# Altium PCB ver_4.PcbDoc
Units mil, origin at the board's own origin, x right, y up, seen from the top; angles counter-clockwise.
Board outline 2834.65 x 4685.04 mil, 2 copper layers (Top Layer, Bottom Layer); 59 components, 48 nets, 245 pads, 35 vias.
Unrouted connection lines stored in the file: 4.
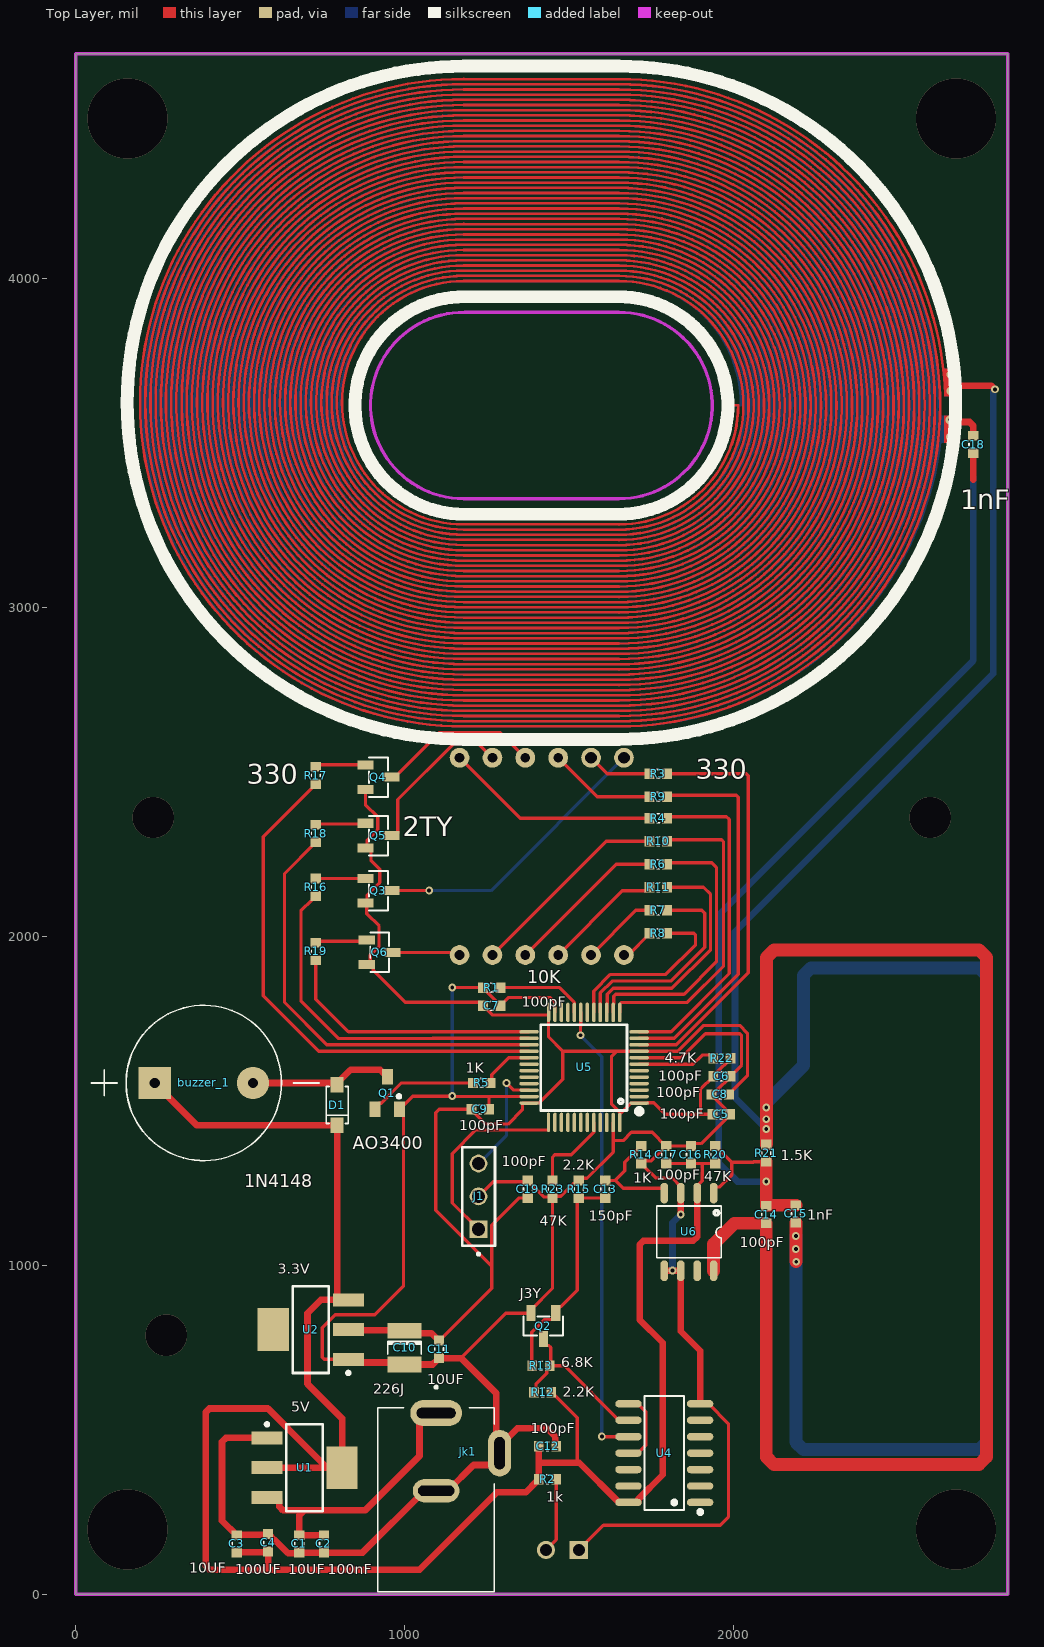
[diagram p0: Top Layer view]
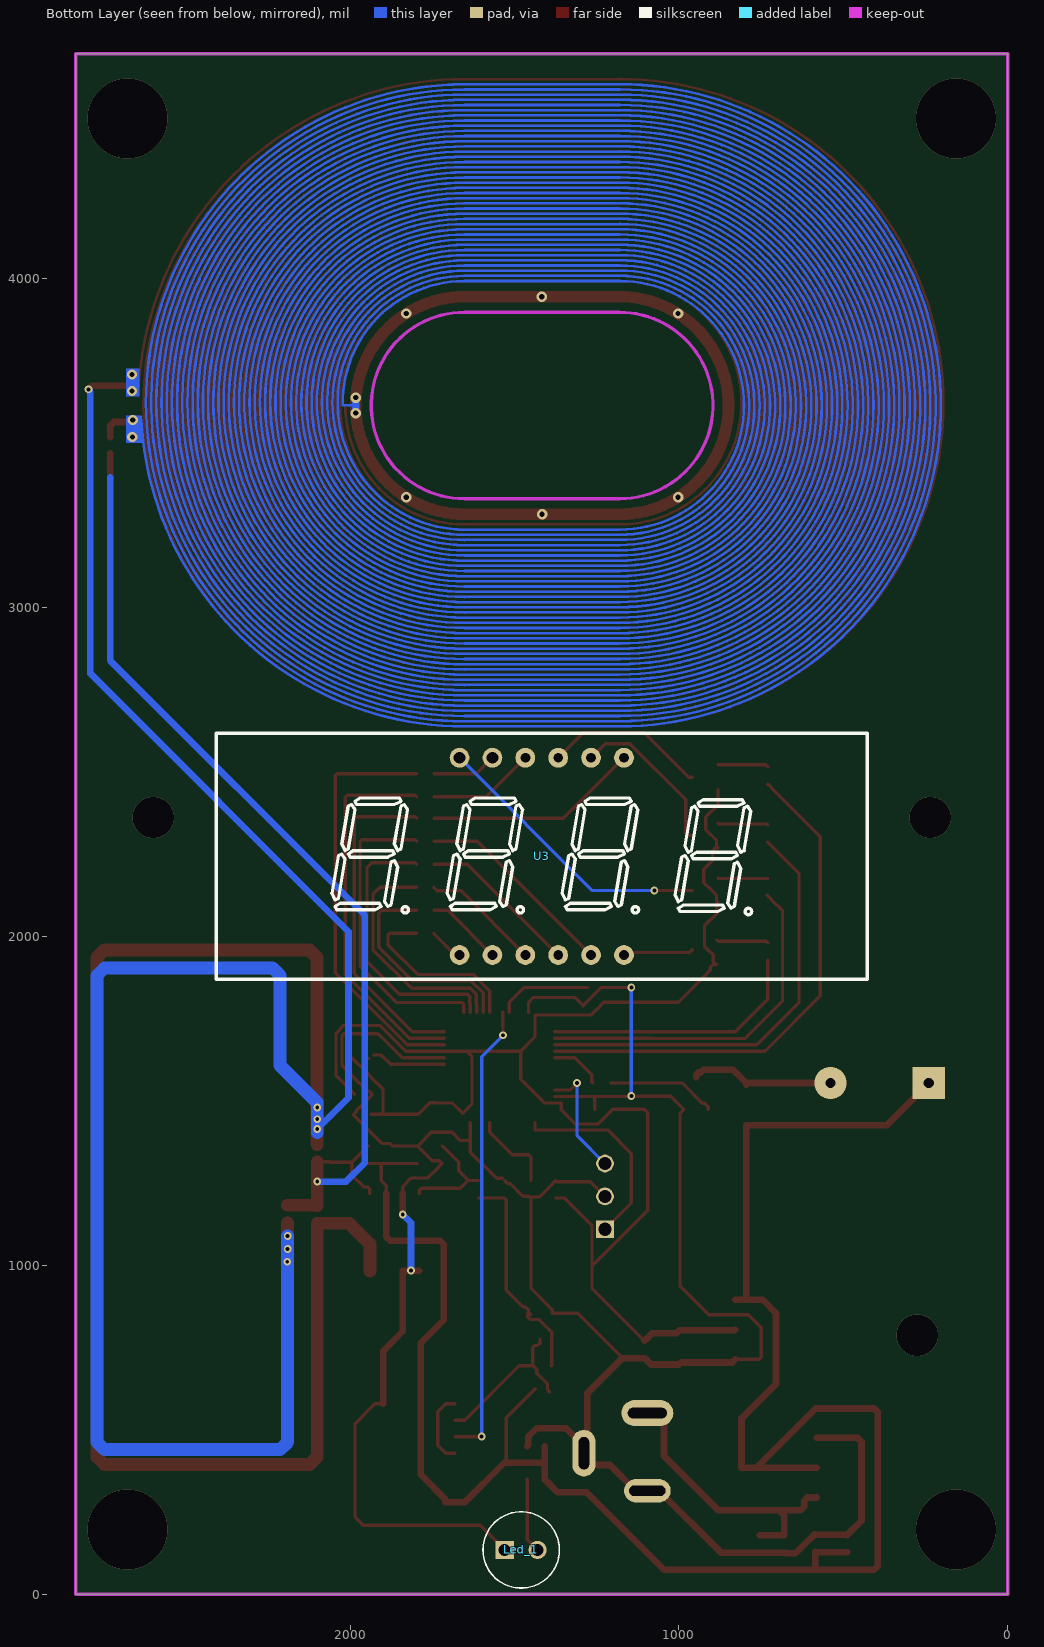
[diagram p1: Bottom Layer view, seen from below]
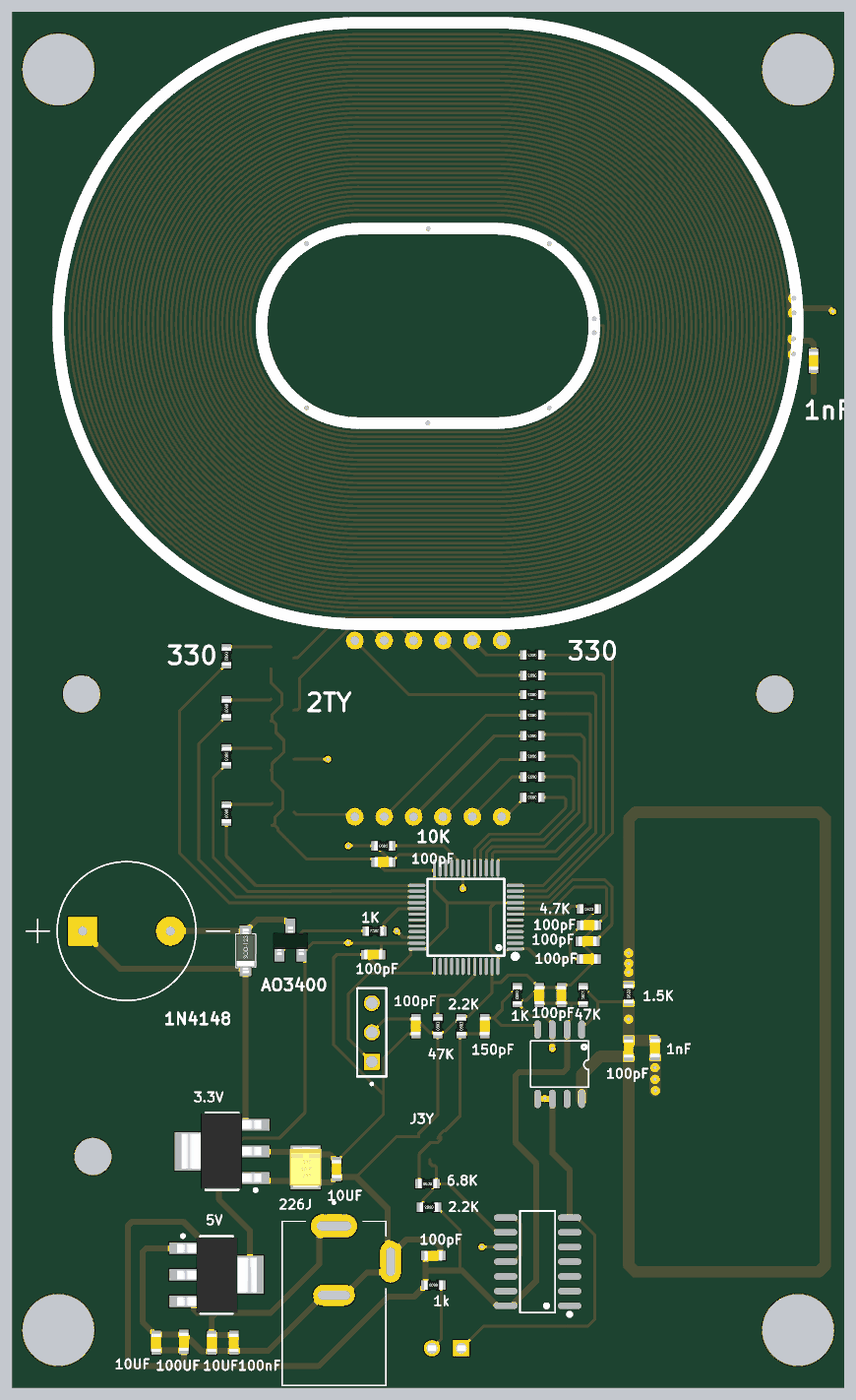
[diagram p2: 3D render of the assembled board from above, using the file's embedded part models]

## Layer stack, top to bottom
Top Solder: solder mask 0.4, Solder Resist, Dk 3.5
Top Layer: signal copper 1.4
Dielectric 1: dielectric 12.6, FR-4, Dk 4.8
Bottom Layer: signal copper 1.4
Bottom Solder: solder mask 0.4, Solder Resist, Dk 3.5

## Board outline
0,0 2834.65,0 2834.65,4685 0,4685.04

## Design rules (kind name [scope] priority, off if disabled: settings)
Clearance [All] p1: gap=7.87 ignorepadtopadclearanceinfootprint=FALSE
PolygonConnect [All] p1: connectstyle=Relief reliefconductorwidth=10 reliefentries=4 polygonreliefangle="90 Angle" airgapwidth=10
RoutingVias [All] p1: holewidth=28 width=50 viastyle="Through Hole" minholewidth=11.81 minwidth=23.62 maxholewidth=11.81 maxwidth=23.62
SolderMaskExpansion [All] p1: expansion=4 istentingtop=FALSE
Width [All] p1: maxlimit=39.37 minlimit=10 preferedwidth=20
30 further rules are at their usual default settings.

## Classes and differential pairs
component class ver_3: buzzer_1 C1 C2 C3 C4 C5 C6 C7 C8 C9 C10 C11 C12 C13 C16 C17 C19 D1 J1 jk1 Led_1 Q1 Q2 Q3 Q4 Q5 Q6 R1 R2 R3 R4 R5 R6 R7 R8 R9 R10 R11 R12 R13 R14 R15 R16 R17 R18 R19 R20 R22 R23 U1 U2 U3 U4 U5 U6

## Components (designator, comment, footprint, x,y, rotation, side; value= is the part's Value field where it differs from the comment)
buzzer_1 "buzzer_12mm" buzzer_12mm 389.61,1555 r0 top
C1 "10uF" CN-SMD-0603 680,153.43 r90 top
C2 "100nF" CN-SMD-0603 755,153.43 r90 top
C3 "10uF" CN-SMD-0603 490,153.43 r270 top
C4 "100uF" CN-SMD-0603 585,156.57 r270 top
C5 "104" CN-SMD-0603 1963.43,1460 r0 top
C6 "104" CN-SMD-0603 1965,1575 r0 top
C7 "104" CN-SMD-0603 1265,1790 r180 top
C8 "104" CN-SMD-0603 1960,1520 r180 top
C9 "104" CN-SMD-0603 1230,1475 r180 top
C10 "226J" C_Tanta_3528 1000,750 r270 top
C11 "10uF" CN-SMD-0603 1105,745 r90 top
C12 "104" CN-SMD-0603 1435,450 r180 top
C13 "150pF" CN-SMD-0603 1610,1231.57 r90 top
C14 "100pF" CN-SMD-0603 2100,1155 r90 top
C15 "1nF" CN-SMD-0603 2190,1156.57 r90 top
C16 "104" CN-SMD-0603 1871.04,1336.57 r270 top
C17 "104" CN-SMD-0603 1796.04,1336.57 r270 top
C18 "1nF" CN-SMD-0603 2730,3496.57 r270 top
C19 "104" CN-SMD-0603 1375,1231.57 r90 top
D1 "1N4148" SOD-123 793.43,1485.63 r270 top value=1N4007
J1 "JP3x1" JP3x1 1225,1035 r90 top
jk1 "jack dc" "jack dc" 1096.18,551.22 r270 top
Led_1 "led_5mm" led_5mm 1480,135 r180 bottom
Q1 "AO3400" SOT23B 947.76,1524.39 r0 top value=C1815
Q2 "J3Y" j3y -15174.6,-16136.99 r90 top
Q3 "2TY" 2TY 17873.25,-14457 r180 top
Q4 "2TY" 2TY 17873.25,-14112 r180 top
Q5 "2TY" 2TY 17873.25,-14289.6 r180 top
Q6 "2TY" 2TY 17876.99,-14644.6 r180 top
R1 "10K" RES-SMD-0603 1265,1845 r0 top value="R1/4W - 1K"
R2 "1K" RES-SMD-0603 1435,350 r180 top value="R1/4W - 1K"
R3 "330" RES-SMD-0603 1771.57,2495 r180 top value="R1/4W - 1K"
R4 "330" RES-SMD-0603 1771.57,2360 r180 top value="R1/4W - 1K"
R5 "1K" RES-SMD-0603 1235,1555 r180 top value="R1/4W - 1K"
R6 "330" RES-SMD-0603 1771.57,2220 r180 top value="R1/4W - 1K"
R7 "330" RES-SMD-0603 1771.57,2080 r180 top value="R1/4W - 1K"
R8 "330" RES-SMD-0603 1771.57,2010 r180 top value="R1/4W - 1K"
R9 "330" RES-SMD-0603 1771.57,2425 r180 top value="R1/4W - 1K"
R10 "330" RES-SMD-0603 1771.57,2290 r180 top value="R1/4W - 1K"
R11 "330" RES-SMD-0603 1771.57,2150 r180 top value="R1/4W - 1K"
R12 "2.2K" RES-SMD-0603 1420,615 r180 top value="R1/4W - 1K"
R13 "6.8K" RES-SMD-0603 1415,695 r0 top value="R1/4W - 1K"
R14 "1K" RES-SMD-0603 1720,1336.57 r270 top value="R1/4W - 1K"
R15 "2.2K" RES-SMD-0603 1530,1231.57 r90 top value="R1/4W - 1K"
R16 "330" RES-SMD-0603 730,2150 r270 top value="R1/4W - 1K"
R17 "330" RES-SMD-0603 730,2490 r270 top value="R1/4W - 1K"
R18 "330" RES-SMD-0603 730,2313.43 r270 top value="R1/4W - 1K"
R19 "330" RES-SMD-0603 730,1955 r270 top value="R1/4W - 1K"
R20 "47K" RES-SMD-0603 1945,1336.57 r90 top value="R1/4W - 1K"
R21 "1K5" RES-SMD-0603 2100,1341.57 r90 top value="R1/4W - 1K"
R22 "4.7K" RES-SMD-0603 1965,1630 r0 top value="R1/4W - 1K"
R23 "47K" RES-SMD-0603 1450,1231.57 r90 top value="R1/4W - 1K"
U1 "AMS1117" AMS1117-SOT223 695.83,385 r0 top
U2 "AMS1117" AMS1117-SOT223 715,805 r180 top
U3 "7seg4_5461AS-1_1" 7seg4_5461AS-1 1417.32,2244.09 r180 bottom
U4 "SN74HC14DRG4" 74HC14 1790,425 r90 top
U5 "STM32F103C8T6" LQFP-48_L7.0-W7.0-P0.50-LS9.0-BL 1546.1,1602.32 r90 top
U6 "MC12079" MC12079 1865,1101.89 r180 top

## Footprints (in the part's own frame and the unit in brackets; to place one, negate y for a bottom-side part, rotate by r counter-clockwise, add the part's x,y. Pads: shape width x height; smd on the part's side, far side on the other; paste and mask are expansions set on the pad)
2TY [mm]
  rect 1.25x0.7 smd paste+0 mask+0.051: 1(431.596,-422.514) 2(431.596,-420.614) 3(429.597,-421.564)
  silkscreen extent 429.87,-423.09 431.32,-420.04
7seg4_5461AS-1 [mil]
  round 60 hole 30 paste+0 mask+2: 1(-250,-300) 2(-150,-300) 3(-50,-300) 4(50,-300) 5(150,-300) 6(250,-300) 7(250,300) 8(150,300) 9(50,300) 10(-50,300)
  round 60 hole 36 paste+0 mask+2: 11(-150,300) 12(-250,300)
  silkscreen extent -990,-374 990,374
74HC14 [mil]
  oval 22.6x80.24 smd paste+0 mask+2: 1(-145.63,-109.02) 2(-95.63,-109.02) 3(-45.63,-109.02) 4(4.37,-109.02) 5(54.37,-109.02) 6(104.37,-109.02) 7(154.37,-109.02) 8(154.37,109.02) 9(104.37,109.02) 10(54.37,109.02) 11(4.37,109.02) 12(-45.63,109.02) 13(-95.63,109.02) 14(-145.63,109.02)
  silkscreen extent -181,-115 178,60
AMS1117-SOT223 [mm]
  rect 2.4x1 smd: 1(-2.9,2.3) 2(-2.9,0) 3(-2.9,-2.3)
  rect 2.4x3.3 smd: 2(2.9,0)
  silkscreen extent -3.02,-3.35 1.4,3.47, body extent -3.39,-3.27 3.5,3.23, height 1.72
buzzer_12mm [mm]
  round 2.5 hole 0.8: N(3.8,0)
  rect 2.5x2.5 / inner round 2.5 / far side rect 2.5x2.5 hole 0.8: P(-3.8,0)
  silkscreen extent -8.69,-6 8.92,6
C_Tanta_3528 [mm]
  rect 1.2x2.6 smd: 1(-1.3,0) 2(1.3,0)
  silkscreen extent -0.56,-1.3 0.51,1.3, body extent -1.75,-1.4 1.71,1.4, height 1.94
CN-SMD-0603 [mm]
  round 0.254 on Mech15: 0(0,0)
  rect 0.75x0.8 smd: 1(-0.675,0) 2(0.675,0)
  silkscreen extent -0.1,-0.34 0.1,0.34, body extent -0.8,-0.43 0.8,0.43, height 0.8
j3y [mm]
  rect 1.25x0.7 smd paste+0 mask+0.051: 1(431.596,-422.514) 2(431.596,-420.614) 3(429.597,-421.564)
  silkscreen extent 429.87,-423.09 431.32,-420.04
"jack dc" [mm]
  oval 2x4 hole 0.8 slot 3 at 90 deg: 1(0,0)
  oval 1.8x3.6 hole 0.8 slot 2.8 at 90 deg: 2(6,0)
  oval 3.6x1.8 hole 0.8 slot 2.5 at 0 deg: 3(3.1,4.9)
  silkscreen extent -2.1,-4.5 13.8,4.5
JP3x1 [mm]
  rect 1.37x1.37 hole 1.02: 01(1.905,0)
  round 1.37 hole 1.02: 02(4.445,0) 03(6.985,0)
  silkscreen extent -0.11,-1.27 8.25,1.27
led_5mm [mm]
  round 1.4 hole 0.93: A(1.27,0)
  rect 1.4x1.4 / inner round 1.4 / far side rect 1.4x1.4 hole 0.93: C(-1.27,0)
  silkscreen extent -2.95,-2.95 2.95,2.95, body extent -2.5,-2.95 2.95,2.95, height 9.6
LQFP-48_L7.0-W7.0-P0.50-LS9.0-BL [mm]
  oval 0.27x1.5 smd paste+0 mask+0.05: 1(-2.75,-4.25) 2(-2.25,-4.25) 3(-1.75,-4.25) 4(-1.25,-4.25) 5(-0.75,-4.25) 6(-0.25,-4.25) 7(0.25,-4.25) 8(0.75,-4.25) 9(1.25,-4.25) 10(1.75,-4.25) 11(2.25,-4.25) 12(2.75,-4.25) 25(2.75,4.25) 26(2.25,4.25) 27(1.75,4.25) 28(1.25,4.25) 29(0.75,4.25) 30(0.25,4.25) 31(-0.25,4.25) 32(-0.75,4.25) 33(-1.25,4.25) 34(-1.75,4.25) 35(-2.25,4.25) 36(-2.75,4.25)
  oval 1.5x0.27 smd paste+0 mask+0.05: 13(4.25,-2.75) 14(4.25,-2.25) 15(4.25,-1.75) 16(4.25,-1.25) 17(4.25,-0.75) 18(4.25,-0.25) 19(4.25,0.25) 20(4.25,0.75) 21(4.25,1.25) 22(4.25,1.75) 23(4.25,2.25) 24(4.25,2.75) 37(-4.25,2.75) 38(-4.25,2.25) 39(-4.25,1.75) 40(-4.25,1.25) 41(-4.25,0.75) 42(-4.25,0.25) 43(-4.25,-0.25) 44(-4.25,-0.75) 45(-4.25,-1.25) 46(-4.25,-1.75) 47(-4.25,-2.25) 48(-4.25,-2.75)
  silkscreen extent -3.59,-4.46 3.3,3.34, body extent -4.5,-4.5 4.5,4.5, height 1.5
MC12079 [mm]
  oval 0.6x1.6 smd paste+0 mask+0.051: 1(-1.905,-3) 2(-0.635,-3) 3(0.635,-3) 4(1.905,-3) 5(1.905,3) 6(0.635,3) 7(-0.635,3) 8(-1.905,3)
  silkscreen extent -2.5,-2 2.5,2
RES-SMD-0603 [mm]
  round 0.254 on Mech15: 0(0,0)
  rect 0.75x0.8 smd: 1(-0.675,0) 2(0.675,0)
  silkscreen extent -0.1,-0.34 0.1,0.34, body extent -0.8,-0.4 0.8,0.4, height 0.43
SOD-123 [mm]
  rect 1.2x1 smd: 1(-1.635,0.04) 2(1.515,0.04)
  silkscreen extent -1.48,-0.81 1.37,0.89, body extent -1.98,-0.81 1.87,0.89, height 1.43
SOT23B [mm]
  rect 0.85x1.2 smd: 1(0.946,-1.255) 2(0.006,1.24) 3(-0.944,-1.26)
  silkscreen extent 0.77,-0.39 1.02,-0.14, body extent -1.49,-1.31 1.51,1.19, height 1.06

## Part data
C1 C2 C3 C4 C11: library part "CAP 104"
C5 C6 C7 C8 C9 C12 C13 C14 C15 C16 C17 C18 C19: library part "Tu 0805_1", "Tu 0805", Bottom=10, Right=20
C10: library part "CAP POL"
D1: library part D1A, "Diode 1A"
Q1: library part C1815, "NPN 600mW, ECB"
Q2: library part S8050/J3Y/0.4
R1 R12 R13 R14 R15 R20 R21 R22 R23: library part "Tro 0805_1", "Tro 0805"
R2 R3 R4 R5 R6 R7 R8 R9 R10 R11 R16 R17 R18 R19: library part Res, "Resistor 1/4W"
U5: library part APM32F030C8T6

## Via types
v1: diameter 23.62, hole 11.81, Top Layer to Bottom Layer, 16 vias
v2: diameter 31.5, hole 15.75, Top Layer to Bottom Layer, 12 vias
v3: diameter 244.09, hole 244.09, Top Layer to Bottom Layer, 4 vias
v4: diameter 125.98, hole 125.98, Top Layer to Bottom Layer, 3 vias

## Nets (pads, with @x,y where several pads share a name; then routed paths per layer and width w, separated by ;. In a path a pad name is that pad's centre, name@x,y a point inside that pad or via, vN(x,y) a via of type N, cw(c..) or ccw(c..) an arc to the next point about the centre after c; other vN are vias at no path point)
3V3: C5.1 C6.1 C7.2 C8.1 C9.2 C10.1 C11.2 C19.1 Q3.2 Q4.2 Q5.2 Q6.2 R22.2 U2.2 U5.1 U5.9 U5.24 U5.36 U5.48 | length 4870.4
  Top Layer w10: Q4.2 881.26,2401.4 918.74,2363.92 918.74,2325.69 885.97,2292.92 885.97,2274.71 Q5.2 889.14,2270 897.92,2261.22 897.92,2232.08 925,2205 925,2164.55 902.59,2142.13 902.13,2142.13 885.97,2125.97 885.97,2107.31 Q3.2 885,2098.86 885,2070 922.48,2032.52 922.48,1970.69 909.02,1957.24 896.02,1944.23 896.02,1923.78 Q6.2@887.24,1915 ; Q6.2 Q6.2@887.24,1915 ; C11.2 1105.98,771.57 1264.84,930.43 1264.84,998.01 ; C19.1 1347.13,1205 1264.84,1122.71 1264.84,998.01 ; 1654.25,1465.36 1629.61,1490 1629.61,1636.14 1645,1651.53 ; U5.48@1657.39,1462.23 1689.21,1494.05 U5.1 1737.8,1494.05 1738.76,1495 1758.43,1495 1793.43,1460 1900,1460 ; C5.1 1900,1460 ; C8.1 1986.57,1520.98 2042.87,1577.28 2042.87,1706.55 2019.42,1730 1910,1730 1831.52,1651.53 U5.9 1645,1651.53 ; R22.2 1991.57,1629.02 1948.31,1585.75 1948.19,1585.75 1938.43,1575.98 C6.1 1938.43,1574.02 1900,1535.59 1900,1460 ; Q6.2@887.24,1915 895.83,1915 904.61,1906.22 904.61,1897.63 1001.49,1800.75 1228.66,1800.75 1238.43,1790.98 C7.2 1238.43,1789.02 1248.19,1779.25 1250.75,1779.25 1268.62,1761.38 1437.55,1761.38 1437.84,1761.09 1437.84,1695 1481.31,1651.53 ; 1264.84,998.01 1221.51,1041.35 1095,1167.86 1095,1464.14 1105.86,1475 C9.2 1203.43,1474.02 1247.44,1430 1314.74,1430 1358.47,1473.73 1358.47,1493.76 1358.76,1494.05 U5.36 1378.91,1494.17 1409.15,1494.17 1481.31,1566.33 1481.31,1651.53 ; 1481.31,1651.53 1645,1651.53
  Top Layer w20: U2.2@829.17,805 831.08,803.09 998.09,803.09 C10.1 1006.77,794.41 1081.18,794.41 1099.25,776.34 1100.24,776.34 C11.2
4A: Q2.3 R12.2 R13.2 U4.9 | length 502.3
  Top Layer w10: R12.2 1399.89,621.47 1399.89,639.89 1432.42,672.42 1432.42,684.25 1443.17,695 R13.2@1445,695 ; Q2.3 1422.4,765.44 1431.18,756.66 1439.14,756.66 1445,750.8 R13.2@1445,695 ; U4.9 1652.16,529.37 1486.54,695 R13.2@1445,695
4Y: U4.8 U4.11 | length 227.7
  Top Layer w10: U4.11 1709.8,429.37 1733.98,453.55 1733.98,555.2 1709.8,579.37 U4.8
5V: buzzer_1.P C3.2 C4.2 C12.2 C16.2 C17.2 D1.2 R2.2 R12.1 R20.1 U1.2 U2.3 U4.14 U6.2 | length 6346.4
  Top Layer w10: R12.1@1436.74,624.83 1525,536.57 1525,400 ; C17.2 C16.2 1900,1310 R20.1 ; U6.2 1890,1242.35 1905,1257.35 1905,1310
  Top Layer w20: buzzer_1.P 369.02,1425.98 D1.2 795,905.24 U2.3@804.69,895.55 ; C3.2@488.43,128.43 C4.2@584.41,128.43 ; U1.2@581.65,385 U1.2@764.41,385 ; C4.2 585,80 580,75 ; U2.3 U2.3@804.69,895.55 ; C12.2 1408.43,400 ; U6.2 1890,1086.72 1878.28,1075 1726.72,1075 1715,1063.28 1715,835 1785,765 1785,363.31 1710.3,288.61 1710.3,280.57 1709.1,279.37 1652.16,279.37 1531.54,400 1408.43,400 ; 580,75 1045.74,75 1280.74,310 1368.43,310 1402.68,344.25 1403.66,344.25 1408.43,349.02 R2.2 1408.43,400 ; 580,75 406.72,75 395,86.72 395,553.28 406.72,565 584.41,565 708.38,441.03 U1.2@764.41,385 ; U1.2@764.41,385 810,385 810,535 705,640 705,855 745.55,895.55 795,895.55 U2.3@804.69,895.55
9V: C1.2 C2.2 jk1.1 U1.3 | length 881
  Top Layer w20: U1.3 609.21,294.45 618.9,284.76 618.9,266.72 630.61,255 695,255 ; C2.2 C1.2 680,240 695,255 ; jk1.1 1072.71,551.22 1045.57,524.09 1045.57,420.57 880,255 695,255
A: R3.2 U3.11 | length 198
  Top Layer w10: U3.11 1616.42,2495 R3.2
B: R4.2 U3.7 | length 653.9
  Top Layer w10: U3.7 1351.42,2360 R4.2
BOOT0: R23.2 U5.44 | length 259.2
  Top Layer w10: R23.2@1450.98,1258.15 R23.2 1450,1329.25 1457.25,1336.51 1507.39,1336.51 1575.51,1404.63 1575.51,1434.88 U5.44
buzzer: R5.1 U5.29 | length 161.7
  Top Layer w10: R5.1 1264.89,1558.32 1264.89,1579.89 1316.85,1631.85 U5.29
C: R6.2 U3.4 | length 492
  Top Layer w10: U3.4 1643.22,2220 R6.2
D: R7.2 U3.2 | length 234
  Top Layer w10: U3.2 1703.22,2080 R7.2
DIG1: Q3.3 U3.12 | length 874.7
  Top Layer w10: Q3.3 v1(1075,2140)
  Bottom Layer w10: v1(1075,2140) 1263.22,2140 U3.12
DIG2: Q4.3 U3.9 | length 494.7
  Top Layer w10: Q4.3 970.83,2485 1105.83,2620 1291.42,2620 U3.9
DIG3: Q5.3 U3.8 | length 499.9
  Top Layer w10: Q5.3 970.83,2307.4 979.61,2316.18 979.61,2417.02 1149.56,2586.97 1224.44,2586.97 U3.8
DIG4: Q6.3 U3.6 | length 213.9
  Top Layer w10: Q6.3@960,1960 967.95,1952.05 1159.37,1952.05 U3.6
DP: R11.2 U3.3 | length 363.5
  Top Layer w10: U3.3 1662.47,2139.25 1735.24,2139.25 1745,2149.02 R11.2
E: R8.2 U3.1 | length 105.6
  Top Layer w10: U3.1 1680.08,1944.1 1745,2009.02 R8.2
F: R9.2 U3.10 | length 327
  Top Layer w10: U3.10 1586.42,2425 R9.2
G: R10.2 U3.5 | length 621
  Top Layer w10: U3.5 1613.22,2290 R10.2
GND: C1.1 C2.1 C3.1 C4.1 C5.2 C6.2 C7.1 C8.2 C9.1 C10.2 C11.1 C12.1 C16.1 C17.1 C19.2 J1.02 jk1.2 jk1.3 Led_1.C Q1.1 Q2.2 R1.1 R14.2 R15.2 R23.1 U1.1 U2.1 U4.7 U5.8 U5.23 U5.35 U5.47 U6.3 U6.5 U6.6 | length 8666.1
  Top Layer w10: U2.1 828.62,715 755.86,715 750,720.86 750,810.96 789.04,850 910,850 996.73,936.73 996.73,1463.27 Q1.1 1025,1515 v1(1145,1515) ; v1(1145,1845) R1.1 ; v1@1146.26,1513.74 1256.57,1513.74 U5.35 ; 1171.57,718.43 1308.15,855 Q2.2 1385,865.83 1450,930.83 R23.1 ; J1.02 1270,1255 1371.85,1255 C19.2 1375.98,1258.15 1385.75,1248.39 1385.75,1247.4 1425.11,1208.04 1446.96,1208.04 R23.1 ; R1.1@1238.43,1844.02 1248.19,1834.25 1248.31,1834.25 C7.1@1291.57,1790.98 ; C9.1 1256.57,1510.93 ; jk1.3@1289.09,416.78 jk1.3 ; U5.23 1457.41,1769.76 1457.41,1800 1442.41,1815 1316.57,1815 1302.32,1800.75 1301.34,1800.75 C7.1@1291.57,1790.98 ; Led_1.C 1605,210 1960,210 1985,235 1985,519.14 1924.77,579.37 U4.7 ; R15.2 1520.24,1248.39 1512.35,1248.39 1474.89,1210.93 1455.93,1210.93 R23.1 ; R15.2@1536.74,1264.89 1554.89,1264.89 1634.8,1344.8 1634.8,1379.74 ; U5.47 1634.8,1434.87 1634.8,1379.74 ; U5.8 1841.85,1631.85 1915,1705 2019.14,1705 2025,1699.14 2025,1609.41 1991.57,1575.98 C6.2 1991.57,1574.02 1948.31,1530.75 1943.19,1530.75 1933.43,1520.98 C8.2 1933.43,1519.02 1980.24,1472.2 1980.24,1468.78 1990,1459.02 1901.79,1370.81 1878.7,1370.81 C16.1 C17.1 C17.1@1795.06,1363.15 ; U6.3 1840,1239.68 1813.59,1266.1 1763.9,1266.1 1730.75,1299.25 1730.75,1300.24 1720.98,1310 R14.2 1728.84,1318.84 1750.75,1318.84 C17.1@1795.06,1363.15 ; C7.1@1291.57,1790.98 C7.1 C7.1@1291.57,1790.98 ; 1634.8,1379.74 1664.74,1379.74 1690,1405 1753.21,1405 C17.1@1795.06,1363.15
  Top Layer w20: C3.1@488.68,180.17 445,223.86 445,463.84 456.72,475.55 U1.1 ; C3.1@490.59,181.57 583.43,181.57 C4.1 585.98,183.15 604.89,164.24 606.55,164.24 645.97,124.82 674.25,124.82 676.28,126.85 C1.1 C2.1 872.6,126.85 1060.75,315 jk1.2 1131.61,315 1209.9,393.28 1265.6,393.28 jk1.3@1289.09,416.78 ; U2.1 838.62,705 993.82,705 C10.2 1085.39,698.82 1099.25,712.68 1099.25,713.66 1104.02,718.43 C11.1 1171.57,718.43 1279.36,610.64 jk1.3@1279.36,450.84 ; jk1.3@1289.09,450.84 1343.25,505 1432.72,505 1458.18,479.54 1458.18,453.4 C12.1 ; U6.5 1815,983.78 U6.6 1840,800 1899.02,740.98 U4.7 ; v1(1840,1155) U6.3
  Bottom Layer w10: v1(1145,1515) v1(1145,1845)
  Bottom Layer w20: v1(1815,985) 1815,1130 v1(1840,1155)
Netbuzzer_1_N: buzzer_1.N D1.1 Q1.2 | length 442.8
  Top Layer w20: buzzer_1.N D1.1@795,1555 ; D1.1 795,1553.94 836.06,1595 926.21,1595 934.38,1586.84 941.27,1586.84 948,1580.1 Q1.2
NetC13_1: C13.1 Q2.1 R13.1 R15.1 | length 678.2
  Top Layer w10: R13.1 1388.43,695.98 1387.82,695.61 1387.6,695.83 1386.85,697.23 1386.85,797.3 1424.94,835.39 1451.02,835.39 1459.8,844.17 Q2.1 ; Q2.1@1450.26,850.26 1457.4,857.4 1457.4,863.43 1468.58,874.61 1474.61,874.61 1525,925 1525,1200 R15.1 C13.1
NetC14_1: C14.1 C15.1 C18.1 R21.2 U6.8 | length 7177.7
  Top Layer w39.37: U6.8 1940,1065 2003.43,1128.43 C14.1 2100,418.06 2123.06,395 2746.94,395 2770,418.06 2770,465 2770,1936.94 2746.94,1960 2124.21,1960 2101.15,1936.94 2101.15,1480 2101.15,1445 2101.15,1415 2101.15,1369.3 R21.2 ; v1@2190,1011.46 v1(2190,1050) v1(2190,1090) C15.1
  Bottom Layer w20: v1(2100,1415) 2005,1510 2005,2015 2790,2800 2790,3657.57 2795.73,3663.29 v1(2795.73,3664.27)
  other v1: 2191.26,1011.46 2100,1445 2100,1480
NetC14_2: C14.2 C15.2 C18.2 R20.2 R21.1 U6.1 | length 3178
  Top Layer w10: U6.1 1940,1232.51 1946.29,1238.8 1958.8,1238.8 1995,1275 1995,1314.13 ; R20.2 1945.98,1363.15 1995,1314.13 ; R21.1 2060.98,1315 2060.12,1314.13 1995,1314.13
  Top Layer w20: 2730,3390 C18.2
  Top Layer w39.37: R21.1 v1(2100,1255) C14.2 2101.57,1183.15 C15.2
  Bottom Layer w20: v1(2100,1255) 2012.6,1255 1955,1312.6 1955,2065 2730,2840 2730,3396.71
Netled_1_A: Led_1.A R2.1 | length 228.1
  Top Layer w10: Led_1.A 1461.57,166.57 R2.1
NetQ1_3: Q1.3 R5.2 | length 335.1
  Top Layer w10: Q1.3 910.6,1481.68 922.33,1493.41 929.22,1493.41 990.81,1555 R5.2
NetQ3_1: Q3.1 R16.1 | length 151.6
  Top Layer w10: R16.1 730.41,2176.99 880.85,2176.99 Q3.1
NetQ4_1: Q4.1 R17.1 | length 153.7
  Top Layer w10: R17.1 735.83,2522.4 Q4.1
NetQ5_1: Q5.1 R18.1 | length 153.3
  Top Layer w10: R18.1 732.4,2342.4 878.86,2342.4 Q5.1
NetQ6_1: Q6.1 R19.1 | length 158.4
  Top Layer w10: R19.1 734.11,1985.69 880.89,1985.69 Q6.1
NRST: R22.1 U5.7 | length 228.1
  Top Layer w10: U5.7 1877.15,1612.16 1905,1640 R22.1@1928.43,1640 ; R22.1@1943.63,1629.25 R22.1@1945.24,1629.25
OUT: C13.2 R14.1 U6.4 | length 339
  Top Layer w10: C13.2 1610.47,1258.62 1640.75,1258.62 ; R14.1 1719.02,1363.15 1670,1314.13 1670,1287.87 1640.75,1258.62 ; U6.4 1790,1228.39 1783.71,1234.68 1664.68,1234.68 1640.75,1258.62
PA0: R3.1 U5.10 | length 1270.5
  Top Layer w10: U5.10 1825.94,1671.22 2045,1890.28 2045,2489.14 2039.14,2495 R3.1
PA1: R9.1 U5.11 | length 1142.1
  Top Layer w10: U5.11 1820.34,1690.89 2015,1885.56 2015,2424.14 2009.14,2430 1803.15,2430 R9.1
PA2: R4.1 U5.12 | length 1011.7
  Top Layer w10: U5.12 1810.59,1710.59 1987.87,1887.87 1987.87,2356.27 1979.14,2365 1803.15,2365 R4.1
PA3: R10.1 U5.13 | length 943.4
  Top Layer w10: U5.13 1654.38,1793.83 1660.55,1800 1860,1800 1970,1910 1970,2289.14 1964.14,2295 1803.15,2295 R10.1
PA4: R6.1 U5.14 | length 851.3
  Top Layer w10: U5.14 1634.69,1794.02 1636.19,1795.52 1636.19,1819.14 1642.04,1825 1850,1825 1948.62,1923.62 1948.62,2210.52 1934.14,2225 1803.15,2225 R6.1
PA5: R11.1 U5.15 | length 735.7
  Top Layer w10: U5.15 1615.01,1794.02 1616.5,1795.51 1616.5,1824.73 1634.64,1842.87 1813.15,1842.87 1930.75,1960.47 1930.75,2128.39 1909.14,2150 R11.1
PA6: R7.1 U5.16 | length 656.1
  Top Layer w10: U5.16 1595.32,1828.83 1631.49,1865 1810,1865 1912.87,1967.87 1912.87,2071.27 1904.14,2080 R7.1
PA7: R8.1 U5.17 | length 550.8
  Top Layer w10: U5.17 1575.64,1834.42 1626.21,1885 1795,1885 1885,1975 1885,2004.14 1879.14,2010 R8.1
PB0: R17.2 U5.28 | length 1588.8
  Top Layer w10: R17.2 729.02,2463.43 719.25,2453.66 719.25,2452.68 570,2303.43 570,1820 738.48,1651.53 U5.28
PB1: U4.10 U5.19 | length 1398.3
  Top Layer w10: v1(1535,1700) 1535,1726.81 1536.15,1727.96 1536.15,1769.52 U5.19 ; v1(1600,480) 1600.63,479.37 U4.10
  Bottom Layer w10: v1(1535,1700) 1600,1635 v1(1600,480)
PB2: R1.2 U5.20 | length 288.5
  Top Layer w10: R1.2@1277.06,1845 1471.47,1845 1516.46,1800.02 1516.46,1769.76 U5.20
PC13: R19.2 U5.25 | length 808.4
  Top Layer w10: R19.2 730,1810 829.41,1710.59 U5.25
PC14: R16.2 U5.26 | length 1082.5
  Top Layer w10: R16.2@732.18,2125.61 731.2,2125.61 719.25,2113.66 719.25,2112.68 685,2078.43 685,1805 800,1690 1084.25,1690 1085.15,1690.89 U5.26
PC15: R18.2 U5.27 | length 1323.3
  Top Layer w10: R18.2 635,2191.85 635,1800 763.78,1671.22 U5.27
SWCLK: J1.01 U5.37 | length 608.5
  Top Layer w10: J1.01 1145,1190 1145,1340 1217.13,1412.13 1437.54,1412.13 1437.83,1412.42 U5.37
SWDIO: J1.03 U5.34 | length 357.9
  Top Layer w10: v1(1310,1555) 1331.46,1533.54 1378.67,1533.54 U5.34
  Bottom Layer w10: J1.03 1310,1395 v1(1310,1555)
pads on no net: C1.0 C2.0 C3.0 C4.0 C5.0 C6.0 C7.0 C8.0 C9.0 C11.0 C12.0 C13.0 C14.0 C15.0 C16.0 C17.0 C18.0 C19.0 R1.0 R2.0 R3.0 R4.0 R5.0 R6.0 R7.0 R8.0 R9.0 R10.0 R11.0 R12.0 R13.0 R14.0 R15.0 R16.0 R17.0 R18.0 R19.0 R20.0 R21.0 R22.0 R23.0 U4.1 U4.2 U4.3 U4.4 U4.5 U4.6 U4.12 U4.13 U5.2 U5.3 U5.4 U5.5 U5.6 U5.18 U5.21 U5.22 U5.30 U5.31 U5.32 U5.33 U5.38 U5.39 U5.40 U5.41 U5.42 U5.43 U5.45 U5.46 U6.7
copper on no net: | length 417770.4
  Top Layer w8: 1180.12,3993.8 ccw(c1180.12,3623.72) 1180.12,3253.64 1652.19,3253.64 ; 1180.12,4009.54 ccw(c1180.12,3623.72) 1180.12,3237.89 1652.19,3237.89 ; 1180.12,4025.29 ccw(c1180.12,3623.72) 1180.12,3222.14 1652.19,3222.14 ; 1180.12,4041.04 ccw(c1180.12,3623.72) 1180.12,3206.39 1652.19,3206.39 ; 1180.12,4056.79 ccw(c1180.12,3623.72) 1180.12,3190.65 1652.19,3190.65 ; 1180.12,4072.54 ccw(c1180.12,3623.72) 1180.12,3174.9 1652.19,3174.9 ; 1180.12,4088.28 ccw(c1180.12,3623.72) 1180.12,3159.15 1652.19,3159.15 ; 1180.12,4104.03 ccw(c1180.12,3623.72) 1180.12,3143.4 1652.19,3143.4 ; 1180.12,4119.78 ccw(c1180.12,3623.72) 1180.12,3127.65 1652.19,3127.65 ; 1180.12,4135.53 ccw(c1180.12,3623.72) 1180.12,3111.91 1652.19,3111.91 ; 1180.12,4151.28 ccw(c1180.12,3623.72) 1180.12,3096.16 1652.19,3096.16 ; 1180.12,4167.02 ccw(c1180.12,3623.72) 1180.12,3080.41 1652.19,3080.41 ; 1180.12,4182.77 ccw(c1180.12,3623.72) 1180.12,3064.66 1652.19,3064.66 ; 1180.12,4198.52 ccw(c1180.12,3623.72) 1180.12,3048.91 1652.19,3048.91 ; 1180.12,4214.27 ccw(c1180.12,3623.72) 1180.12,3033.17 1652.19,3033.17 ; 1180.12,4230.02 ccw(c1180.12,3623.72) 1180.12,3017.42 1652.19,3017.42 ; 1180.12,4245.76 ccw(c1180.12,3623.72) 1180.12,3001.67 1652.19,3001.67 ; 1180.12,4261.51 ccw(c1180.12,3623.72) 1180.12,2985.92 1652.19,2985.92 ; 1180.12,4277.26 ccw(c1180.12,3623.72) 1180.12,2970.17 1652.19,2970.17 ; 1180.12,4293.01 ccw(c1180.12,3623.72) 1180.12,2954.43 1652.19,2954.43 ; 1180.12,4308.76 ccw(c1180.12,3623.72) 1180.12,2938.68 1652.19,2938.68 ; 1180.12,4324.5 ccw(c1180.12,3623.72) 1180.12,2922.93 1652.19,2922.93 ; 1180.12,4340.25 ccw(c1180.12,3623.72) 1180.12,2907.18 1652.19,2907.18 ; 1180.12,4356 ccw(c1180.12,3623.72) 1180.12,2891.43 1652.19,2891.43 ; 1180.12,4371.75 ccw(c1180.12,3623.72) 1180.12,2875.69 1652.19,2875.69 ; 1180.12,4387.5 ccw(c1180.12,3623.72) 1180.12,2859.94 1652.19,2859.94 ; 1180.12,4403.24 ccw(c1180.12,3623.72) 1180.12,2844.19 1652.19,2844.19 ; 1180.12,4418.99 ccw(c1180.12,3623.72) 1180.12,2828.44 1652.19,2828.44 ; 1180.12,4434.74 ccw(c1180.12,3623.72) 1180.12,2812.69 1652.19,2812.69 ; 1180.12,4450.49 ccw(c1180.12,3623.72) 1180.12,2796.94 1652.19,2796.94 ; 1180.12,4466.24 ccw(c1180.12,3623.72) 1180.12,2781.2 1652.19,2781.2 ; 1180.12,4481.98 ccw(c1180.12,3623.72) 1180.12,2765.45 1652.19,2765.45 ; 1180.12,4497.73 ccw(c1180.12,3623.72) 1180.12,2749.7 1652.19,2749.7 ; 1180.12,4513.48 ccw(c1180.12,3623.72) 1180.12,2733.95 1652.19,2733.95 ; 1180.12,4529.23 ccw(c1180.12,3623.72) 1180.12,2718.2 1652.19,2718.2 ; 1180.12,4544.98 ccw(c1180.12,3623.72) 1180.12,2702.46 1652.19,2702.46 ; 1180.12,4560.72 ccw(c1180.12,3623.72) 1180.12,2686.71 1652.19,2686.71 ; 1180.12,4576.47 ccw(c1180.12,3623.72) 1180.12,2670.96 1652.19,2670.96 ; 1180.12,4592.22 ccw(c1180.12,3623.72) 1180.12,2655.21 1652.19,2655.21 ; 1180.12,4607.97 ccw(c1180.12,3623.72) 1180.12,2639.46 1652.19,2639.46 ; 1180.33,3993.58 1652.4,3993.58 cw(c1652.4,3615.63) 1652.4,3237.68 ; 1180.33,4009.33 1652.4,4009.33 cw(c1652.4,3615.63) 1652.4,3221.93 ; 1180.33,4025.08 1652.4,4025.08 cw(c1652.4,3615.63) 1652.4,3206.18 ; 1180.33,4040.83 1652.4,4040.83 cw(c1652.4,3615.63) 1652.4,3190.43 ; 1180.33,4056.57 1652.4,4056.57 ; 1180.33,4072.32 1652.4,4072.32 cw(c1652.4,3615.63) 1652.4,3158.94 ; 1180.33,4088.07 1652.4,4088.07 cw(c1652.4,3615.63) 1652.4,3143.19 ; 1180.33,4103.82 1652.4,4103.82 cw(c1652.4,3615.63) 1652.4,3127.44 ; 1180.33,4119.57 1652.4,4119.57 cw(c1652.4,3615.63) 1652.4,3111.69 ; 1180.33,4135.32 1652.4,4135.32 cw(c1652.4,3615.63) 1652.4,3095.94 ; 1180.33,4151.06 1652.4,4151.06 cw(c1652.4,3615.63) 1652.4,3080.2 ; 1180.33,4166.81 1652.4,4166.81 cw(c1652.4,3615.63) 1652.4,3064.45 ; 1180.33,4182.56 1652.4,4182.56 cw(c1652.4,3615.63) 1652.4,3048.7 ; 1180.33,4198.31 1652.4,4198.31 cw(c1652.4,3615.63) 1652.4,3032.95 ; 1180.33,4214.06 1652.4,4214.06 cw(c1652.4,3615.63) 1652.4,3017.2 ; 1180.33,4229.8 1652.4,4229.8 cw(c1652.4,3615.63) 1652.4,3001.46 ; 1180.33,4245.55 1652.4,4245.55 cw(c1652.4,3615.63) 1652.4,2985.71 ; 1180.33,4261.3 1652.4,4261.3 cw(c1652.4,3615.63) 1652.4,2969.96 ; 1180.33,4277.05 1652.4,4277.05 cw(c1652.4,3615.63) 1652.4,2954.21 ; 1180.33,4292.8 1652.4,4292.8 cw(c1652.4,3615.63) 1652.4,2938.46 ; 1180.33,4308.54 1652.4,4308.54 cw(c1652.4,3615.63) 1652.4,2922.72 ; 1180.33,4324.29 1652.4,4324.29 cw(c1652.4,3615.63) 1652.4,2906.97 ; 1180.33,4340.04 1652.4,4340.04 cw(c1652.4,3615.63) 1652.4,2891.22 ; 1180.33,4355.79 1652.4,4355.79 cw(c1652.4,3615.63) 1652.4,2875.47 ; 1180.33,4371.54 1652.4,4371.54 cw(c1652.4,3615.63) 1652.4,2859.72 ; 1180.33,4387.28 1652.4,4387.28 cw(c1652.4,3615.63) 1652.4,2843.98 ; 1180.33,4403.03 1652.4,4403.03 cw(c1652.4,3615.63) 1652.4,2828.23 ; 1180.33,4418.78 1652.4,4418.78 cw(c1652.4,3615.63) 1652.4,2812.48 ; 1180.33,4434.53 1652.4,4434.53 cw(c1652.4,3615.63) 1652.4,2796.73 ; 1180.33,4450.28 1652.4,4450.28 cw(c1652.4,3615.63) 1652.4,2780.98 ; 1180.33,4466.02 1652.4,4466.02 cw(c1652.4,3615.63) 1652.4,2765.24 ; 1180.33,4481.77 1652.4,4481.77 cw(c1652.4,3615.63) 1652.4,2749.49 ; 1180.33,4497.52 1652.4,4497.52 cw(c1652.4,3615.63) 1652.4,2733.74 ; 1180.33,4513.27 1652.4,4513.27 cw(c1652.4,3615.63) 1652.4,2717.99 ; 1180.33,4529.02 1652.4,4529.02 cw(c1652.4,3615.63) 1652.4,2702.24 ; 1180.33,4544.76 1652.4,4544.76 cw(c1652.4,3615.63) 1652.4,2686.5 ; 1180.33,4560.51 1652.4,4560.51 cw(c1652.4,3615.63) 1652.4,2670.75 ; 1180.33,4576.26 1652.4,4576.26 cw(c1652.4,3615.63) 1652.4,2655 ; 1180.33,4592.01 1652.4,4592.01 cw(c1652.4,3615.63) 1652.4,2639.25 ; 1180.33,4607.76 1652.4,4607.76 cw(c1652.4,3615.63) 2644.06,3646.2 ; 1652.4,3174.69 ccw(c1652.4,3615.63) 1652.4,4056.57 ; 1652.4,3253.43 ccw(c1652.4,3615.63) 2014.61,3615.63 1983.11,3615.63
  Top Layer w20: v2(2661.26,3571.24) 2667.5,3565 2718.28,3565 2730,3553.28 2730,3518.76 ; v2@2672.26,3659.24 2672.26,3675.61 2784.39,3675.61 2795.73,3664.27
  Top Layer w35.43: 1180.04,3284.53 cw(c1180.04,3615.24) 1182.4,3945.94 1652.48,3945.94 cw(c1652.48,3615.24) 1652.48,3284.53 1180.04,3284.53
  Bottom Layer w8: 1180.12,3993.8 ccw(c1180.12,3615.84) 1180.12,3237.89 1652.19,3237.89 ; 1180.12,4009.54 ccw(c1180.12,3615.84) 1180.12,3222.14 1652.19,3222.14 ; 1180.12,4025.29 ccw(c1180.12,3615.84) 1180.12,3206.39 1652.19,3206.39 ; 1180.12,4041.04 ccw(c1180.12,3615.84) 1180.12,3190.65 1652.19,3190.65 ; 1180.12,4056.79 ccw(c1180.12,3615.84) 1180.12,3174.9 1652.19,3174.9 ; 1180.12,4072.54 ccw(c1180.12,3615.84) 1180.12,3159.15 1652.19,3159.15 ; 1180.12,4088.28 ccw(c1180.12,3615.84) 1180.12,3143.4 1652.19,3143.4 ; 1180.12,4104.03 ccw(c1180.12,3615.84) 1180.12,3127.65 1652.19,3127.65 ; 1180.12,4119.78 ccw(c1180.12,3615.84) 1180.12,3111.91 1652.19,3111.91 ; 1180.12,4135.53 ccw(c1180.12,3615.84) 1180.12,3096.16 1652.19,3096.16 ; 1180.12,4151.28 ccw(c1180.12,3615.84) 1180.12,3080.41 1652.19,3080.41 ; 1180.12,4167.02 ccw(c1180.12,3615.84) 1180.12,3064.66 1652.19,3064.66 ; 1180.12,4182.77 ccw(c1180.12,3615.84) 1180.12,3048.91 1652.19,3048.91 ; 1180.12,4198.52 ccw(c1180.12,3615.84) 1180.12,3033.17 1652.19,3033.17 ; 1180.12,4214.27 ccw(c1180.12,3615.84) 1180.12,3017.42 1652.19,3017.42 ; 1180.12,4230.02 ccw(c1180.12,3615.84) 1180.12,3001.67 1652.19,3001.67 ; 1180.12,4245.76 ccw(c1180.12,3615.84) 1180.12,2985.92 1652.19,2985.92 ; 1180.12,4261.51 ccw(c1180.12,3615.84) 1180.12,2970.17 1652.19,2970.17 ; 1180.12,4277.26 ccw(c1180.12,3615.84) 1180.12,2954.43 1652.19,2954.43 ; 1180.12,4293.01 ccw(c1180.12,3615.84) 1180.12,2938.68 1652.19,2938.68 ; 1180.12,4308.76 ccw(c1180.12,3615.84) 1180.12,2922.93 1652.19,2922.93 ; 1180.12,4324.5 ccw(c1180.12,3615.84) 1180.12,2907.18 1652.19,2907.18 ; 1180.12,4340.25 ccw(c1180.12,3615.84) 1180.12,2891.43 1652.19,2891.43 ; 1180.12,4356 ccw(c1180.12,3615.84) 1180.12,2875.69 1652.19,2875.69 ; 1180.12,4371.75 ccw(c1180.12,3615.84) 1180.12,2859.94 1652.19,2859.94 ; 1180.12,4387.5 ccw(c1180.12,3615.84) 1180.12,2844.19 1652.19,2844.19 ; 1180.12,4403.24 ccw(c1180.12,3615.84) 1180.12,2828.44 1652.19,2828.44 ; 1180.12,4418.99 ccw(c1180.12,3615.84) 1180.12,2812.69 1652.19,2812.69 ; 1180.12,4434.74 ccw(c1180.12,3615.84) 1180.12,2796.94 1652.19,2796.94 ; 1180.12,4450.49 ccw(c1180.12,3615.84) 1180.12,2781.2 1652.19,2781.2 ; 1180.12,4466.24 ccw(c1180.12,3615.84) 1180.12,2765.45 1652.19,2765.45 ; 1180.12,4481.98 ccw(c1180.12,3615.84) 1180.12,2749.7 1652.19,2749.7 ; 1180.12,4497.73 ccw(c1180.12,3615.84) 1180.12,2733.95 1652.19,2733.95 ; 1180.12,4513.48 ccw(c1180.12,3615.84) 1180.12,2718.2 1652.19,2718.2 ; 1180.12,4529.23 ccw(c1180.12,3615.84) 1180.12,2702.46 1652.19,2702.46 ; 1180.12,4544.98 ccw(c1180.12,3615.84) 1180.12,2686.71 1652.19,2686.71 ; 1180.12,4560.72 ccw(c1180.12,3615.84) 1180.12,2670.96 1652.19,2670.96 ; 1180.12,4576.47 ccw(c1180.12,3615.84) 1180.12,2655.21 1652.19,2655.21 ; 1180.12,4592.22 ccw(c1180.12,3615.84) 1180.12,2639.46 1652.19,2639.46 ; 1180.33,3993.58 1652.4,3993.58 cw(c1652.4,3623.5) 2022.42,3617.05 ; 1180.33,4009.33 1652.4,4009.33 cw(c1652.4,3623.5) 1652.4,3237.68 ; 1180.33,4025.08 1652.4,4025.08 cw(c1652.4,3623.5) 1652.4,3221.93 ; 1180.33,4040.83 1652.4,4040.83 cw(c1652.4,3623.5) 1652.4,3206.18 ; 1180.33,4056.57 1652.4,4056.57 ; 1180.33,4072.32 1652.4,4072.32 cw(c1652.4,3623.5) 1652.4,3174.69 ; 1180.33,4088.07 1652.4,4088.07 cw(c1652.4,3623.5) 1652.4,3158.94 ; 1180.33,4103.82 1652.4,4103.82 cw(c1652.4,3623.5) 1652.4,3143.19 ; 1180.33,4119.57 1652.4,4119.57 cw(c1652.4,3623.5) 1652.4,3127.44 ; 1180.33,4135.32 1652.4,4135.32 cw(c1652.4,3623.5) 1652.4,3111.69 ; 1180.33,4151.06 1652.4,4151.06 cw(c1652.4,3623.5) 1652.4,3095.94 ; 1180.33,4166.81 1652.4,4166.81 cw(c1652.4,3623.5) 1652.4,3080.2 ; 1180.33,4182.56 1652.4,4182.56 cw(c1652.4,3623.5) 1652.4,3064.45 ; 1180.33,4198.31 1652.4,4198.31 cw(c1652.4,3623.5) 1652.4,3048.7 ; 1180.33,4214.06 1652.4,4214.06 cw(c1652.4,3623.5) 1652.4,3032.95 ; 1180.33,4229.8 1652.4,4229.8 cw(c1652.4,3623.5) 1652.4,3017.2 ; 1180.33,4245.55 1652.4,4245.55 cw(c1652.4,3623.5) 1652.4,3001.46 ; 1180.33,4261.3 1652.4,4261.3 cw(c1652.4,3623.5) 1652.4,2985.71 ; 1180.33,4277.05 1652.4,4277.05 cw(c1652.4,3623.5) 1652.4,2969.96 ; 1180.33,4292.8 1652.4,4292.8 cw(c1652.4,3623.5) 1652.4,2954.21 ; 1180.33,4308.54 1652.4,4308.54 cw(c1652.4,3623.5) 1652.4,2938.46 ; 1180.33,4324.29 1652.4,4324.29 cw(c1652.4,3623.5) 1652.4,2922.72 ; 1180.33,4340.04 1652.4,4340.04 cw(c1652.4,3623.5) 1652.4,2906.97 ; 1180.33,4355.79 1652.4,4355.79 cw(c1652.4,3623.5) 1652.4,2891.22 ; 1180.33,4371.54 1652.4,4371.54 cw(c1652.4,3623.5) 1652.4,2875.47 ; 1180.33,4387.28 1652.4,4387.28 cw(c1652.4,3623.5) 1652.4,2859.72 ; 1180.33,4403.03 1652.4,4403.03 cw(c1652.4,3623.5) 1652.4,2843.98 ; 1180.33,4418.78 1652.4,4418.78 cw(c1652.4,3623.5) 1652.4,2828.23 ; 1180.33,4434.53 1652.4,4434.53 cw(c1652.4,3623.5) 1652.4,2812.48 ; 1180.33,4450.28 1652.4,4450.28 cw(c1652.4,3623.5) 1652.4,2796.73 ; 1180.33,4466.02 1652.4,4466.02 cw(c1652.4,3623.5) 1652.4,2780.98 ; 1180.33,4481.77 1652.4,4481.77 cw(c1652.4,3623.5) 1652.4,2765.24 ; 1180.33,4497.52 1652.4,4497.52 cw(c1652.4,3623.5) 1652.4,2749.49 ; 1180.33,4513.27 1652.4,4513.27 cw(c1652.4,3623.5) 1652.4,2733.74 ; 1180.33,4529.02 1652.4,4529.02 cw(c1652.4,3623.5) 1652.4,2717.99 ; 1180.33,4544.76 1652.4,4544.76 cw(c1652.4,3623.5) 1652.4,2702.24 ; 1180.33,4560.51 1652.4,4560.51 cw(c1652.4,3623.5) 1652.4,2686.5 ; 1180.33,4576.26 1652.4,4576.26 cw(c1652.4,3623.5) 1652.4,2670.75 ; 1180.33,4592.01 1652.4,4592.01 ; 1652.4,2639.25 ccw(c1652.4,3623.5) 2635.3,3571.99 ; 1652.4,3190.43 ccw(c1652.4,3623.5) 1652.4,4056.57 ; 1652.61,2654.79 ccw(c1652.61,3623.29) 1652.61,4591.8 ; 1983.11,3615.63 2022.48,3615.63
  Bottom Layer w23.62: v2@1983.11,3595.94 v2@1983.11,3635.32
  Bottom Layer w39.37: 2100,1405 2100,1495 2212.66,1607.66 2212.66,1881.75 2235.73,1904.82 2746.94,1904.82 2770,1881.75 2770,462.88 2746.94,439.82 2213.06,439.82 2190,462.88 2190,1090
  other v2: 1416.26,3284.53 1002.8,3336.1 1829.57,3336.1 2662.26,3519.24 1983.11,3592.01 1983.11,3639.25 2663.26,3659.24 2663.26,3709.24 1002.8,3895.16 1829.57,3895.16 1417.44,3945.94
  other v3: 157.48,196.85 2677.17,196.85 157.48,4488.19 2677.17,4488.19
  other v4: 274.96,787.4 236.22,2362.2 2598.43,2362.2

## Keep-outs
Keep-Out Layer:
  lines w10: 0,4685 0,0 2834.65,0 2834.65,4685.04 ; 0,4685.04 2834.65,4685 ; 1180.04,3331.77 cw(c1180.04,3615.24) 1182.06,3898.69 1652.48,3898.7 cw(c1652.48,3615.24) 1652.48,3331.77 1180.04,3331.77

## Other copper
Top Layer:
  region: 2682.26,3728.24 2640.26,3728.24 2640.26,3643.24 2682.26,3643.24
  region: 2682.26,3585.24 2640.59,3585.24 2640.59,3501.24 2682.26,3501.24
Bottom Layer:
  region: 2682.26,3585.24 2632.72,3585.24 2632.72,3501.24 2682.26,3501.24
  region: 2682.26,3728.24 2640.26,3728.24 2640.26,3643.24 2682.26,3643.24

## Silkscreen, mask and mechanical layers (free items; w line width, h text height)
Top Overlay:
  lines w39.37: 1180.04,3284.53 cw(c1180.04,3615.24) 1182.4,3945.94 1652.48,3945.94 cw(c1652.48,3615.24) 1652.48,3284.53 1180.04,3284.53 ; 1180.12,2599.88 cw(c1180.12,3623.5) 1180.12,4647.13 1652.4,4647.13 cw(c1652.4,3623.5) 1652.4,2599.88 1180.12,2599.88
  text "1nF" at 2690,3300 h60
  text "330" at 1885,2480 h60
  text "330" at 520,2465 h60
  text "2TY" at 995,2305 h60
  text "10K" at 1372.87,1857.87 h39.37
  text "100pF" at 1355.91,1786.4 h31.5
  text "4.7K" at 1790.91,1615.91 h31.5
  text "1K" at 1185.91,1585.91 h31.5
  text "100pF" at 1770.91,1561.4 h31.5
  text "100pF" at 1765.91,1511.4 h31.5
  text "100pF" at 1775.91,1446.4 h31.5
  text "100pF" at 1165.91,1411.4 h31.5
  text "AO3400" at 842.87,1352.87 h39.37
  text "1.5K" at 2144.16,1319.48 h31.5
  text "100pF" at 1295.91,1301.4 h31.5
  text "2.2K" at 1480.91,1290.91 h31.5
  text "100pF" at 1765.91,1261.4 h31.5
  text "47K" at 1910.91,1255.91 h31.5
  text "1K" at 1695.91,1250.91 h31.5
  text "1N4148" at 512.87,1237.87 h39.37
  text "1nF" at 2224.24,1138.57 h31.5
  text "150pF" at 1560.91,1136.4 h31.5
  text "47K" at 1410.91,1120.91 h31.5
  text "100pF" at 2019.16,1054.98 h31.5
  text "3.3V" at 614.16,974.48 h31.5
  text "J3Y" at 1350.91,900.91 h31.5
  text "6.8K" at 1475.91,690.91 h31.5
  text "10UF" at 1069.16,639.48 h31.5
  text "226J" at 904.16,609.48 h31.5
  text "2.2K" at 1480.91,600.91 h31.5
  text "5V" at 655.91,555.91 h31.5
  text "100pF" at 1384.16,489.98 h31.5
  text "1k" at 1430.91,280.91 h31.5
  text "10UF" at 345.91,65.91 h31.5
  text "100UF" at 485.91,60.91 h31.5
  text "10UF" at 645.91,60.91 h31.5
  text "100nF" at 765.91,60.91 h31.5